# Altium PCB PCB1.PcbDoc
Units mm, origin at the board's own origin, x right, y up, seen from the top; angles counter-clockwise.
Board outline 57.28 x 52.2 mm, 2 copper layers (Top Layer, Bottom Layer); 29 components, 0 nets, 130 pads, 0 vias.
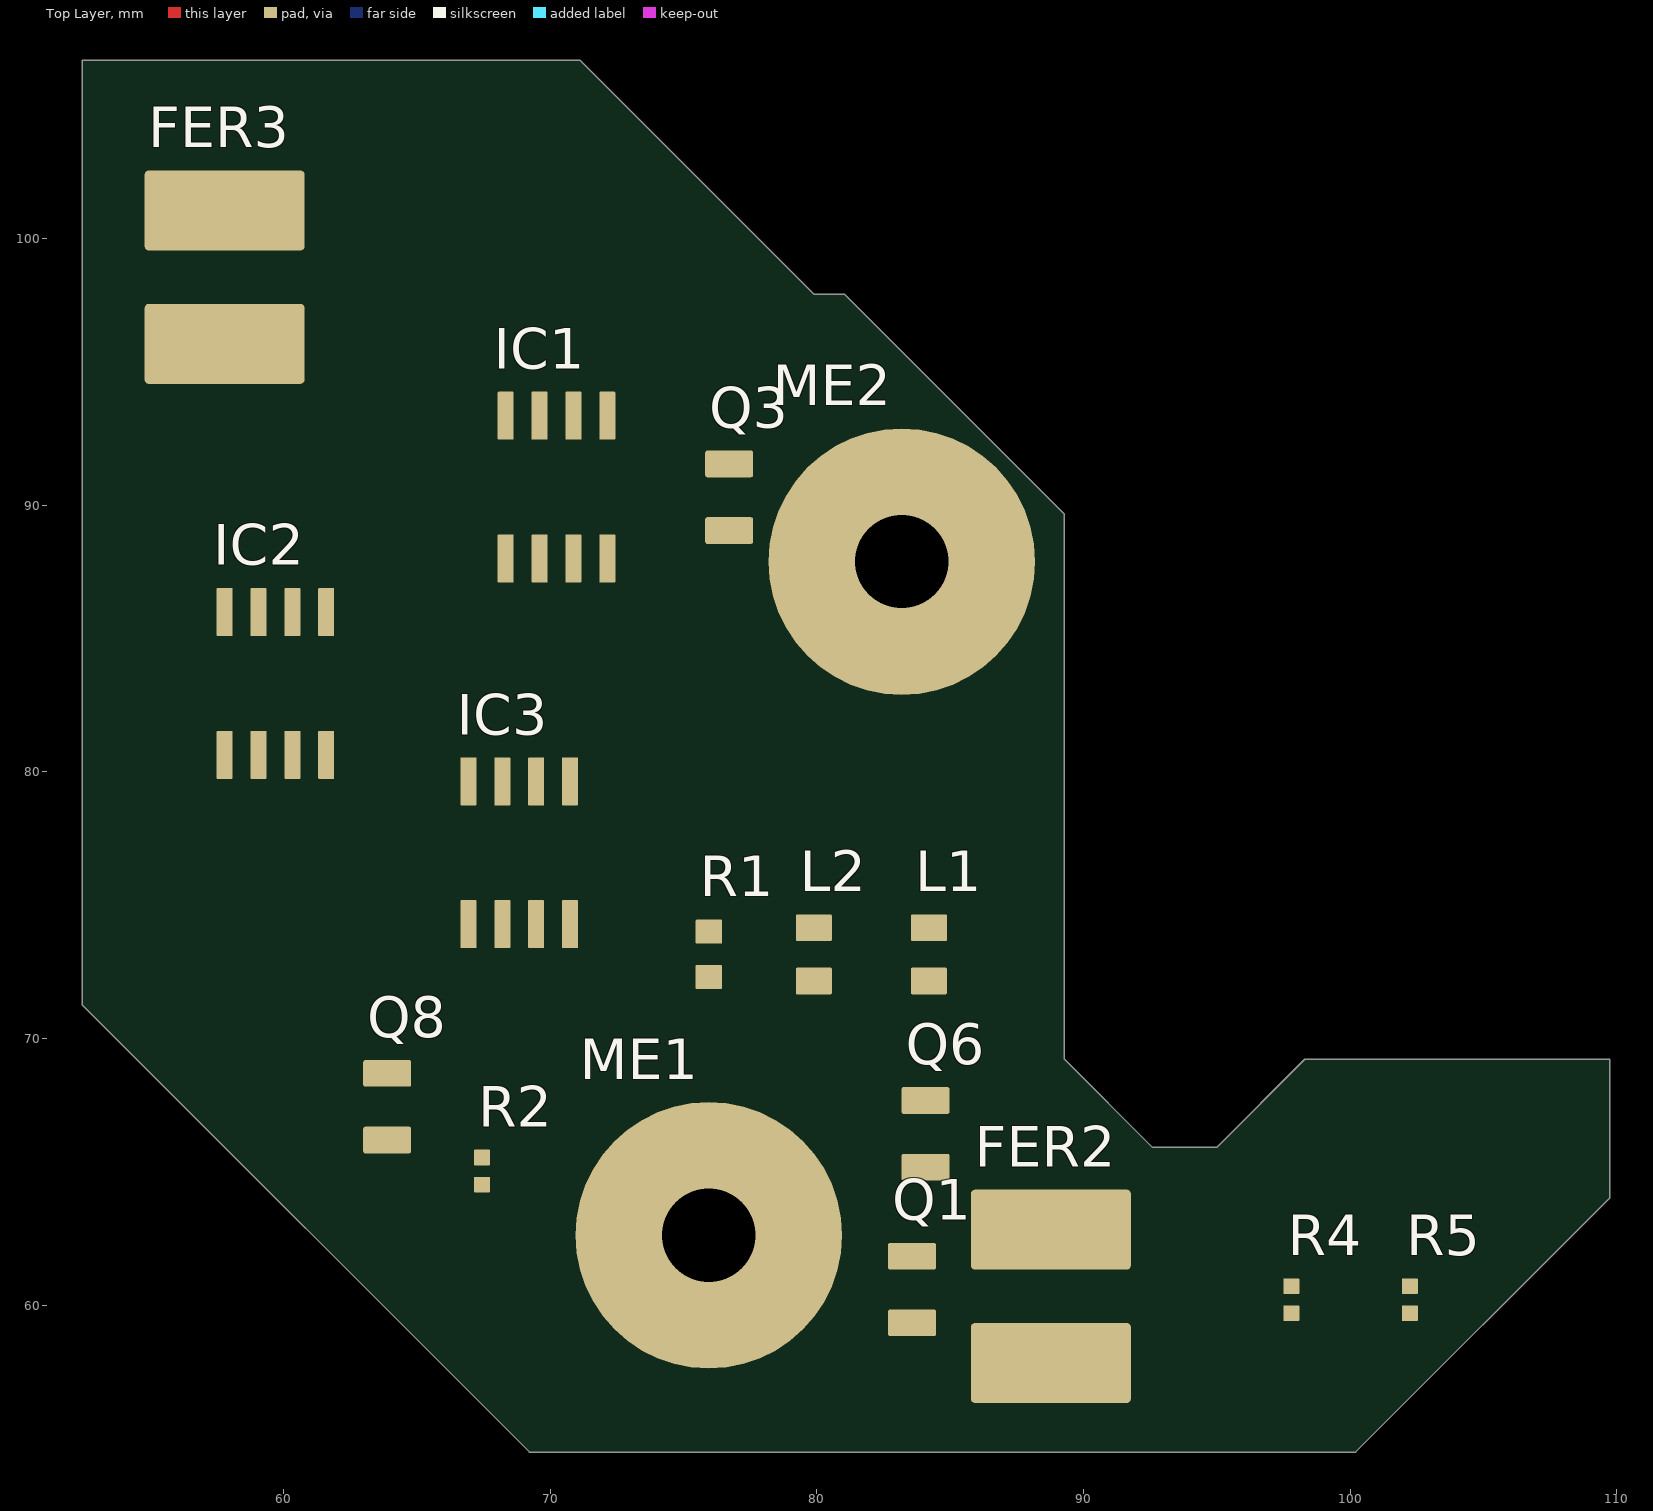
[diagram p0: Top Layer view]
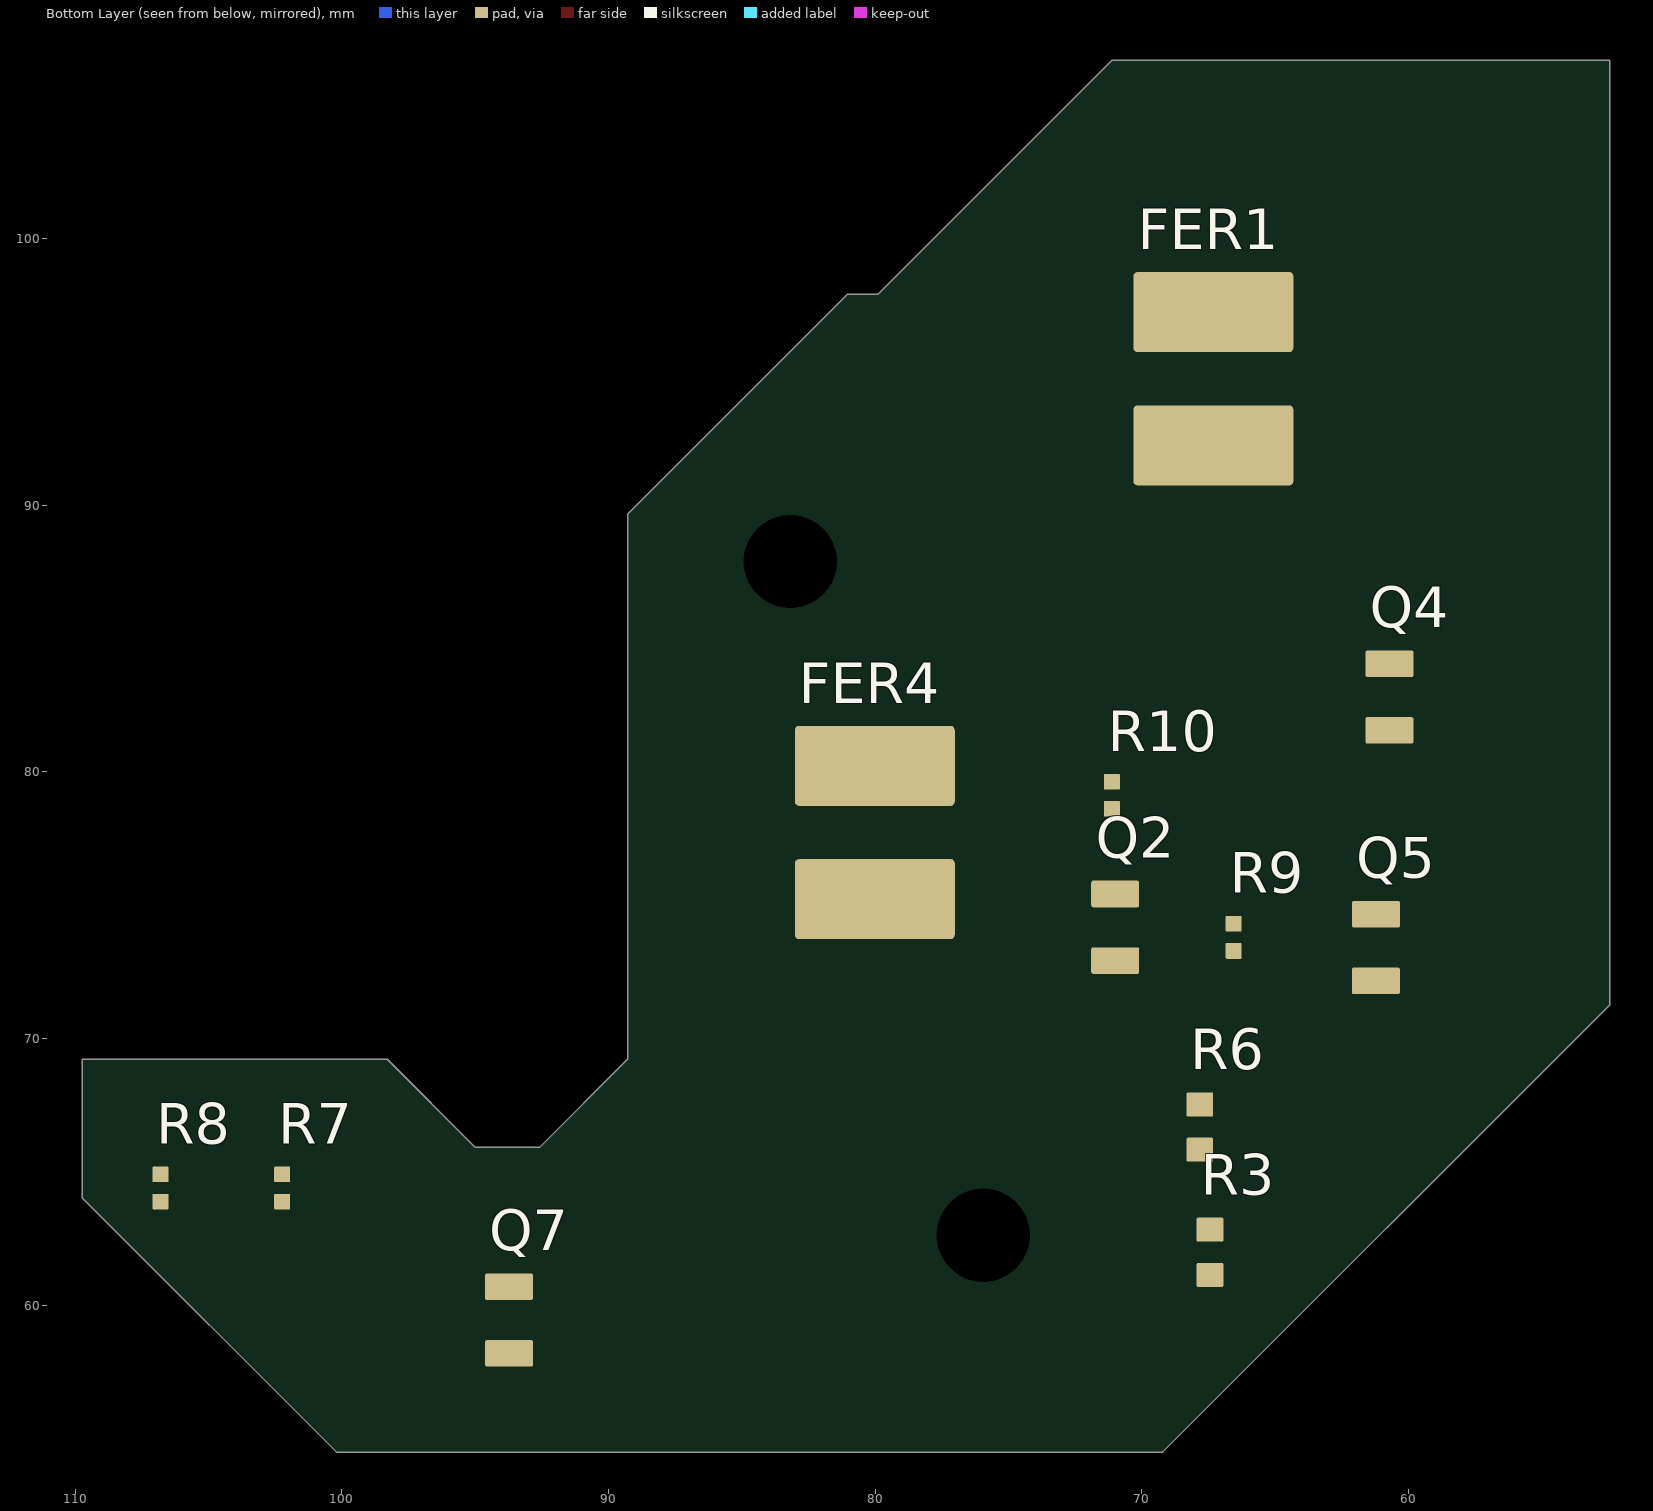
[diagram p1: Bottom Layer view, seen from below]

## Layer stack, top to bottom
Top Solder: solder mask 0.0102, Solder Resist, Dk 3.5
Top Layer: signal copper 0.0356
Dielectric 1: dielectric 0.32, FR-4, Dk 4.8
Bottom Layer: signal copper 0.0356
Bottom Solder: solder mask 0.0102, Solder Resist, Dk 3.5

## Board outline
52.451,71.247 52.451,106.68 71.12,106.68 79.883,97.917 81.026,97.917 89.281,89.662 89.281,69.215 92.583,65.913 94.996,65.913 98.298,69.215 109.728,69.215 109.728,64.008 100.203,54.483 69.215,54.483

## Design rules (kind name [scope] priority, off if disabled: settings)
Clearance [All] p1: gap=0.254
PolygonConnect [All] p1: connectstyle=Relief reliefconductorwidth=0.254 reliefentries=4 polygonreliefangle="90 Angle" airgapwidth=0.254
RoutingVias [All] p1: holewidth=0.711 width=1.27 viastyle="Through Hole" minholewidth=0.711 minwidth=1.27 maxholewidth=0.711 maxwidth=1.27
SolderMaskExpansion [All] p1: expansion=0.102
Width [All] p1: maxlimit=0.254 minlimit=0.254 preferedwidth=0.254
30 further rules are at their usual default settings.

## Components (designator, comment, footprint, x,y, rotation, side; value= is the part's Value field where it differs from the comment)
FER1 "FERRITE" IND_WE-SUKW#1 67.31,94.742 r90 bottom
FER2 "FERRITE" IND_WE-SUKW#2 88.773,60.325 r90 top
FER3 "FERRITE" IND_WE-SUKW#2 57.785,98.552 r90 top
FER4 "FERRITE" IND_WE-SUKW#1 80.01,77.724 r90 bottom
IC1 "MEMORY_I2C-FLASH_8PIN" SOIC127P600X175-8 70.231,90.678 r90 top
IC2 "MEMORY_I2C-FLASH_8PIN" SOIC127P600X175-8 59.69,83.312 r90 top
IC3 "MEMORY_I2C-FLASH_8PIN" SOIC127P600X175-8 68.834,76.962 r90 top
L1 "INDUCTOR" INDC2012N 84.201,73.152 r90 top
L2 "INDUCTOR" INDC2012N 79.883,73.152 r90 top
ME1 "BEFESTIGUNGSPAD" HOLE-3.5MM-10MM-TOP-PAD 75.946,62.611 r0 top
ME2 "BEFESTIGUNGSPAD" HOLE-3.5MM-10MM-TOP-PAD 83.185,87.884 r0 top
Q1 "XTAL_2PINS_1+2" QUARZ_CM315#1 83.566,60.579 r90 top
Q2 "XTAL_2PINS_1+2" QUARZ_CM315#2 70.993,74.168 r90 bottom
Q3 "XTAL_2PINS_1+2" QUARZ_CM315#3 76.708,90.297 r90 top
Q4 "XTAL_2PINS_1+2" QUARZ_CM315#2 60.706,82.804 r90 bottom
Q5 "XTAL_2PINS_1+2" QUARZ_CM315#2 61.214,73.406 r90 bottom
Q6 "XTAL_2PINS_1+2" QUARZ_CM315#1 84.074,66.421 r90 top
Q7 "XTAL_2PINS_1+2" QUARZ_CM315#2 93.726,59.436 r90 bottom
Q8 "XTAL_2PINS_1+2" QUARZ_CM315#1 63.881,67.437 r90 top
R1 "RES" RESC1608N#1 75.946,73.152 r90 top
R2 "RES" RESC1005N#1 67.437,65.024 r90 top
R3 "RES" RESC1608N#2 67.437,61.976 r90 bottom
R4 "RES" RESC1005N#1 97.79,60.198 r90 top
R5 "RES" RESC1005N#1 102.235,60.198 r90 top
R6 "RES" RESC1608N#2 67.818,66.675 r90 bottom
R7 "RES" RESC1005N#2 102.235,64.389 r90 bottom
R8 "RES" RESC1005N#2 106.807,64.389 r90 bottom
R9 "RES" RESC1005N#2 66.548,73.787 r90 bottom
R10 "RES" RESC1005N#2 71.12,79.121 r90 bottom

## Footprints (in the part's own frame and the unit in brackets; to place one, negate y for a bottom-side part, rotate by r counter-clockwise, add the part's x,y. Pads: shape width x height; smd on the part's side, far side on the other; paste and mask are expansions set on the pad)
HOLE-3.5MM-10MM-TOP-PAD [mm] "Hole 3.5mm with 10mm Pad on Top only"
  round 10 / inner round 1.524 / far side round 1.524 hole 3.5 unplated: 1(0,0)
IND_WE-SUKW#1 [mm] "WE-SUKW, Body 8x5mm"
  rrect10% 1.25x5 on Bottom Paste: 0(-3.302,0) 0(-1.651,0) 0(1.651,0) 0(3.302,0)
  rrect10% 3x6 smd paste-20: 1(-2.5,0) 2(2.5,0)
  body extent -4,-2.5 4,2.5, height 4.83
IND_WE-SUKW#2 [mm] "WE-SUKW, Body 8x5mm"
  rrect10% 1.25x5 on Top Paste: 0(-3.302,0) 0(-1.651,0) 0(1.651,0) 0(3.302,0)
  rrect10% 3x6 smd paste-20: 1(-2.5,0) 2(2.5,0)
  body extent -4,-2.5 4,2.5, height 4.83
INDC2012N [mm] "Inductor Chip (0805), 2-Leads, Body 2,0x1,3mm, IPC Medium Density"
  rrect20% 0.9x1.25 on Top Paste paste-2: 0(-1,0) 0(1,0)
  rrect10% 1x1.35 smd paste-2: 1(-1,0) 2(1,0)
  body extent -1,-0.6 1,0.6, height 1.25
QUARZ_CM315#1 [mm] "3.2 x 1.5 x 0.9 mm Quarz"
  rrect20% 0.9x1.7 on Top Paste paste-2: 0(-1.25,0) 0(1.25,0)
  rrect15% 1x1.8 smd paste-2: 1(-1.25,0) 2(1.25,0)
  body extent -1.6,-0.8 1.6,0.8, height 0.9
QUARZ_CM315#2 [mm] "3.2 x 1.5 x 0.9 mm Quarz"
  rrect20% 0.9x1.7 on Bottom Paste paste-2: 0(-1.25,0) 0(1.25,0)
  rrect15% 1x1.8 smd paste-2: 1(-1.25,0) 2(1.25,0)
  body extent -1.6,-0.8 1.6,0.8, height 0.9
QUARZ_CM315#3 [mm] "3.2 x 1.5 x 0.9 mm Quarz"
  rect 0.9x1.7 on Top Paste paste-2: 0(-1.25,0)
  rrect20% 0.9x1.7 on Top Paste paste-2: 0(1.25,0)
  rrect15% 1x1.8 smd paste-2: 1(-1.25,0) 2(1.25,0)
  body extent -1.6,-0.8 1.6,0.8, height 0.9
RESC1005N#1 [mil] "Resistor Chip (0402), Body 1.1x0.5mm, IPC Medium Density"
  rrect20% 22x23.62 on Top Paste paste-78.74: 0(-20,0) 0(20,0)
  rrect10% 23x23.62 smd paste-196.85: 1(20,0) 2(-20,0)
  body extent -20,-10 20,10, height 14
RESC1005N#2 [mil] "Resistor Chip (0402), Body 1.1x0.5mm, IPC Medium Density"
  rrect20% 22x23.62 on Bottom Paste paste-78.74: 0(-20,0) 0(20,0)
  rrect10% 23x23.62 smd paste-196.85: 1(20,0) 2(-20,0)
  body extent -20,-10 20,10, height 14
RESC1608N#1 [mm] "Resistor Chip (0603), Body 1.6x0.8mm, IPC Medium Density"
  rrect20% 0.8x0.9 on Top Paste paste-2: 0(-0.85,0) 0(0.85,0)
  rrect10% 0.9x1 smd paste-2: 1(-0.85,0) 2(0.85,0)
  body extent -0.8,-0.4 0.8,0.4, height 0.45
RESC1608N#2 [mm] "Resistor Chip (0603), Body 1.6x0.8mm, IPC Medium Density"
  rrect20% 0.8x0.9 on Bottom Paste paste-2: 0(-0.85,0) 0(0.85,0)
  rrect10% 0.9x1 smd paste-2: 1(-0.85,0) 2(0.85,0)
  body extent -0.8,-0.4 0.8,0.4, height 0.45
SOIC127P600X175-8 [mm] "S8 Package  8-Lead Plastic Small Outline (Narrow .150 Inch)"
  rrect10% 1.8x0.6 smd: 1(-2.677,1.905) 2(-2.677,0.635) 3(-2.677,-0.635) 4(-2.677,-1.905) 5(2.677,-1.905) 6(2.677,-0.635) 7(2.677,0.635) 8(2.677,1.905)
  body extent -3.01,-2.5 3.01,2.5, height 1.75

## Part data
FER1 FER2 FER3 FER4: library part HA7427511-S22, "Filter, 742 751 1 (Würth), 2 pol SMT, Ferritperle, Imax=5A, 416R"
IC1 IC2 IC3: library part IC24C256-S30, "IC, FM24C256-G (Cypress) / FM24C256-SE, SO8, Serial FRAM, 32Kx8, 5V"
L1 L2: library part PAIMZL2012-S10, "Induktivität, MLZ2012E100MT (TDK Epson), 0805, 10µH"
ME1 ME2: library part AD-HOLE-3.5, "Befestigungsbohrung 3.5mm"
Q1 Q2 Q3 Q4 Q5 Q6 Q7 Q8: library part HANX3215SA-S11, "Quarz, NX3215SA-32.768K-STD-MUA-14 (NDK), 2 pol SMT, Quarz, 32,768kHz, Cl=6pF, 20ppm, -40°C bis 85°C"
R1 R3 R6: library part WI2203-S16, "Widerstand, 0603, 220k, 1%, Metall, Chip, TK100"
R2 R4 R5: library part WI1156-S10, "Widerstand, 0402, 11,5k, 1%, Metall, Chip, TK100"
R7 R8 R9 R10: library part WI1102-S14, "Widerstand, 0402, 11k, 1%, Metall, Chip, TK100"

## Nets (pads, with @x,y where several pads share a name; then routed paths per layer and width w, separated by ;. In a path a pad name is that pad's centre, name@x,y a point inside that pad or via, vN(x,y) a via of type N, cw(c..) or ccw(c..) an arc to the next point about the centre after c; other vN are vias at no path point)
pads on no net: FER1.0 FER1.1 FER1.2 FER2.0 FER2.1 FER2.2 FER3.0 FER3.1 FER3.2 FER4.0 FER4.1 FER4.2 IC1.1 IC1.2 IC1.3 IC1.4 IC1.5 IC1.6 IC1.7 IC1.8 IC2.1 IC2.2 IC2.3 IC2.4 IC2.5 IC2.6 IC2.7 IC2.8 IC3.1 IC3.2 IC3.3 IC3.4 IC3.5 IC3.6 IC3.7 IC3.8 L1.0 L1.1 L1.2 L2.0 L2.1 L2.2 ME1.1 ME2.1 Q1.0 Q1.1 Q1.2 Q2.0 Q2.1 Q2.2 Q3.0 Q3.1 Q3.2 Q4.0 Q4.1 Q4.2 Q5.0 Q5.1 Q5.2 Q6.0 Q6.1 Q6.2 Q7.0 Q7.1 Q7.2 Q8.0 Q8.1 Q8.2 R1.0 R1.1 R1.2 R2.0 R2.1 R2.2 R3.0 R3.1 R3.2 R4.0 R4.1 R4.2 R5.0 R5.1 R5.2 R6.0 R6.1 R6.2 R7.0 R7.1 R7.2 R8.0 R8.1 R8.2 R9.0 R9.1 R9.2 R10.0 R10.1 R10.2

## Silkscreen, mask and mechanical layers (free items; w line width, h text height)
Mechanical 1:
  the board outline again, w0.254